# Altium PCB NES Emulator PCB.PcbDoc (part 3 of 3)
Units mm, origin at the board's own origin, x right, y up, seen from the top; angles counter-clockwise.
Board outline 76 x 100 mm, 4 copper layers (Top Layer, GND Plane, Power Layer, Bottom Layer), stack 0.603 mm thick; 101 components, 158 nets, 536 pads, 230 vias.
Unrouted connection lines stored in the file: 6.
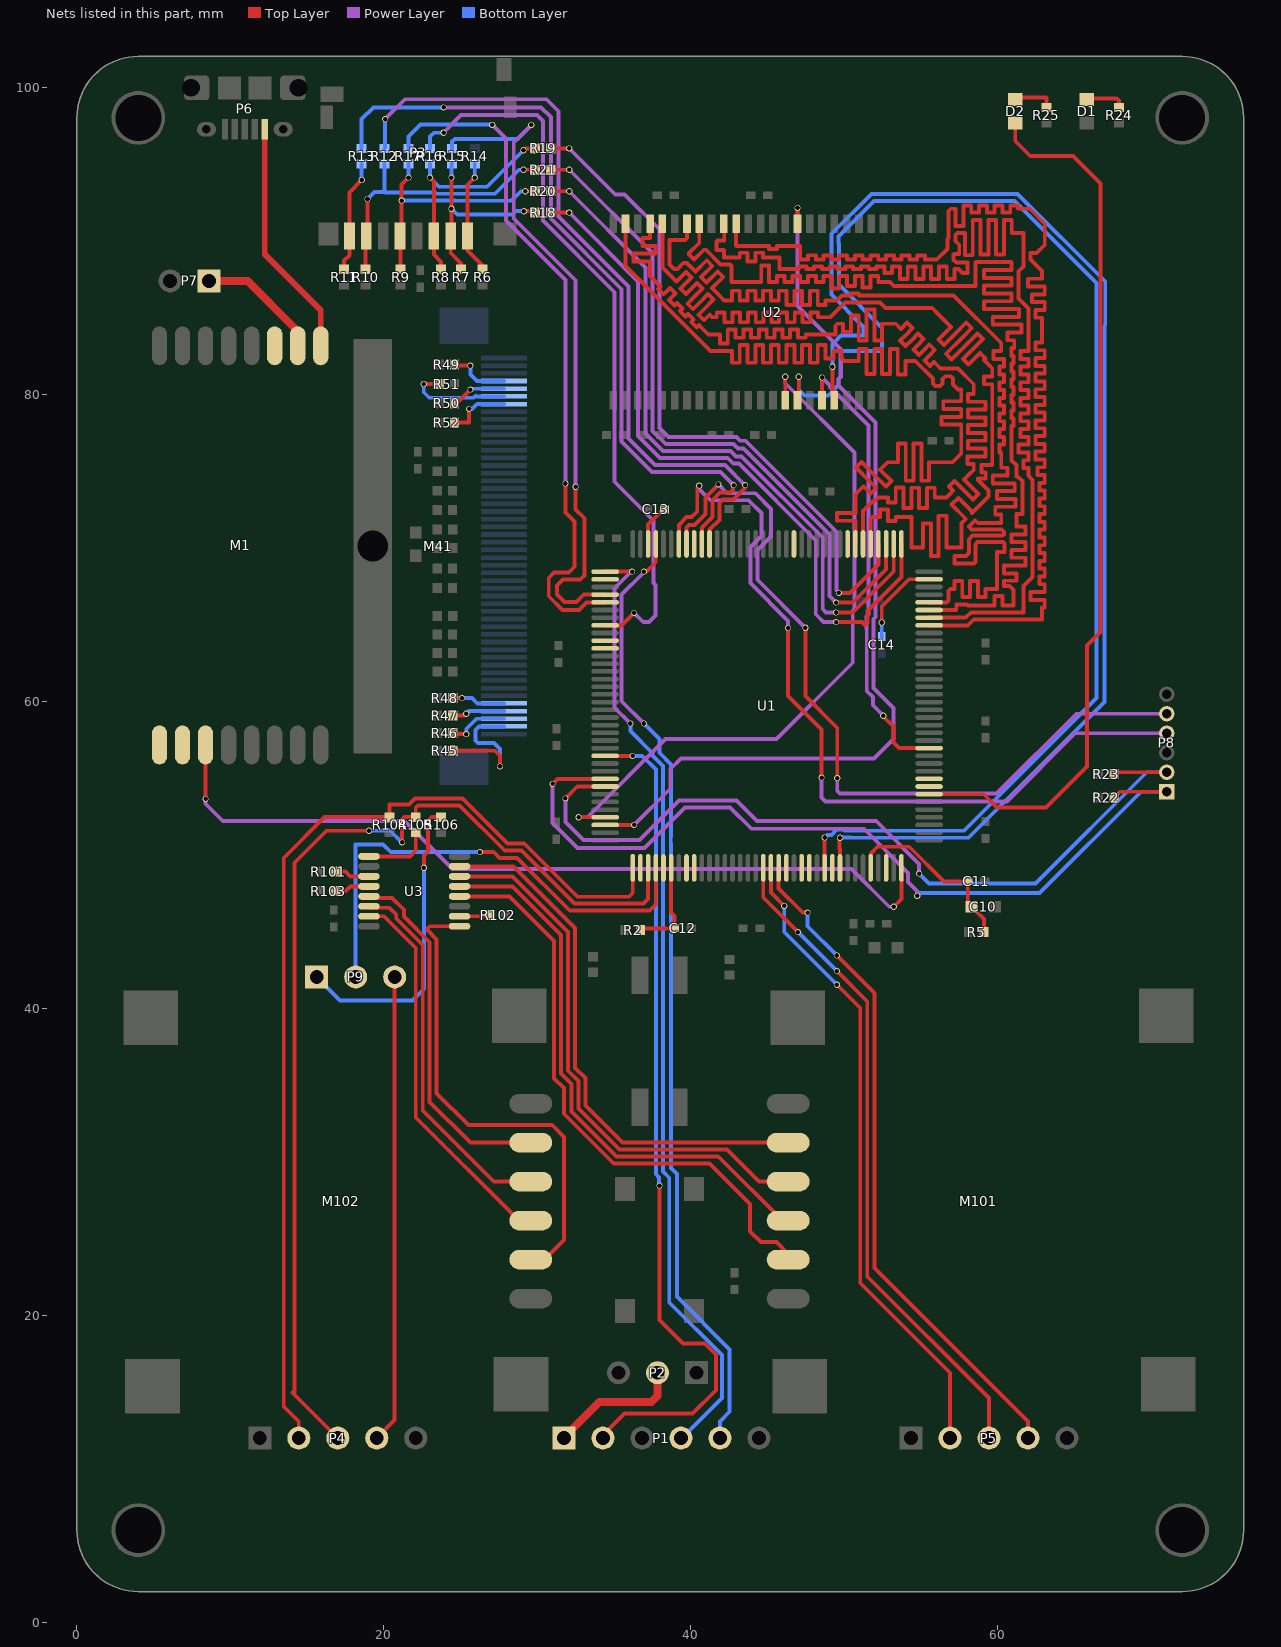
[diagram p5: the nets of this part, all layers, seen from the top]

## Via types
v1: diameter 0.4, hole 0.3, Top Layer to Bottom Layer, 225 vias
v2: diameter 0.65, hole 0.5, Top Layer to Bottom Layer, 2 vias
v3: diameter 0.6, hole 0.4, Top Layer to Bottom Layer, 2 vias
v4: diameter 0.45, hole 0.3, Top Layer to Bottom Layer, 1 vias

## Nets (pads, with @x,y where several pads share a name; then routed paths per layer and width w, separated by ;. In a path a pad name is that pad's centre, name@x,y a point inside that pad or via, vN(x,y) a via of type N, cw(c..) or ccw(c..) an arc to the next point about the centre after c; other vN are vias at no path point) (continued)
MEM_D9: U1.65 U2.44 | length 92.1
  Top Layer w0.254: U2.44@42.941,91.094 42.941,89.675 42.954,89.662 43.817,89.662 45.087,89.662 45.087,89.459 45.595,89.459 45.595,89.662 45.849,89.662 47.119,89.662 47.119,88.773 47.627,88.773 47.627,89.046 48.135,89.046 48.135,88.773 48.643,88.773 48.643,89.039 49.151,89.039 49.151,88.773 49.659,88.773 49.659,89.039 50.167,89.039 50.167,88.773 50.675,88.773 50.675,89.039 51.183,89.039 51.183,88.773 51.691,88.773 51.691,89.039 52.199,89.039 52.199,88.773 52.707,88.773 52.707,89.039 53.215,89.039 53.215,88.773 53.723,88.773 53.723,89.039 54.231,89.039 54.231,88.773 54.739,88.773 54.739,89.039 55.247,89.039 55.247,88.773 55.755,88.773 56.009,88.773 56.703,89.467 56.703,90.101 56.772,90.171 56.772,91.924 56.923,92.075 57.241,92.075 57.241,90.944 57.749,90.944 57.749,92.075 57.749,92.284 58.257,92.284 58.257,92.075 58.257,91.819 58.765,91.819 58.765,92.075 58.765,92.284 59.273,92.284 59.273,92.075 59.273,91.819 59.781,91.819 59.781,92.075 59.781,92.284 60.289,92.284 60.289,92.075 60.289,91.821 60.797,91.821 60.797,92.075 60.797,92.284 61.305,92.284 61.305,92.075 61.813,92.075 62.067,92.075 63.048,91.094 63.048,89.716 62.519,89.187 62.124,89.187 62.124,88.766 62.867,88.023 62.867,87.884 62.867,87.514 61.946,87.514 61.946,87.006 62.867,87.006 63.048,87.006 63.048,86.498 62.867,86.498 62.216,86.498 62.216,85.99 62.867,85.99 63.048,85.99 63.048,85.482 62.867,85.482 62.431,85.482 62.431,84.974 62.867,84.974 62.867,84.466 62.867,84.212 62.867,83.82 62.867,83.365 62.432,83.365 62.432,82.857 62.867,82.857 63.048,82.857 63.048,82.349 62.867,82.349 62.432,82.349 62.432,81.841 62.867,81.841 63.048,81.841 63.048,81.333 62.867,81.333 62.432,81.333 62.432,80.825 62.867,80.825 63.048,80.825 63.048,80.317 62.867,80.317 62.432,80.317 62.432,79.809 62.867,79.809 63.048,79.809 63.048,79.301 62.867,79.301 62.432,79.301 62.432,78.793 62.867,78.793 63.048,78.793 63.048,78.285 62.867,78.285 62.432,78.285 62.432,77.777 62.867,77.777 63.048,77.777 63.048,77.269 62.867,77.269 62.432,77.269 62.432,76.761 62.867,76.761 63.048,76.761 63.048,76.253 62.867,76.253 62.432,76.253 62.432,75.745 62.867,75.745 63.048,75.745 63.048,75.237 62.867,75.237 62.58,75.237 62.58,74.729 62.867,74.729 63.048,74.729 63.048,74.221 62.867,74.221 62.704,74.221 62.704,73.713 62.867,73.713 63.048,73.713 63.048,73.205 62.867,73.205 62.704,73.205 62.704,72.697 62.867,72.697 63.048,72.697 63.048,72.189 62.867,72.189 62.704,72.189 62.704,71.681 62.867,71.681 63.048,71.681 63.048,71.173 62.867,71.173 62.704,71.173 62.704,70.665 62.867,70.665 63.048,70.665 63.048,70.157 62.867,70.157 62.704,70.157 62.704,69.649 62.867,69.649 63.048,69.649 63.048,69.141 62.867,69.141 62.704,69.141 62.704,68.633 62.867,68.633 63.048,68.633 63.048,68.125 62.867,68.125 62.704,68.125 62.704,67.617 62.867,67.617 63.048,67.617 63.048,67.109 62.867,67.109 62.124,67.109 62.124,66.601 62.867,66.601 63.048,66.601 63.048,66.093 62.867,66.093 62.867,65.585 62.867,65.331 58.422,65.331 58.031,64.94 U1.65@55.51,64.94
MEM_D10: U1.66 U2.45 | length 92.2
  Top Layer w0.254: U2.45@42.141,91.094 42.166,91.069 42.166,90.009 41.726,90.009 41.658,89.941 41.658,89.391 41.666,89.382 42.132,89.382 42.141,89.374 42.141,88.909 42.166,88.909 42.674,88.909 43.182,88.909 43.182,89.208 43.69,89.208 43.69,88.909 43.69,88.628 44.198,88.628 44.198,88.909 44.198,89.208 44.706,89.208 44.706,88.909 45.214,88.909 45.468,88.909 45.768,88.909 45.759,88.9 45.759,88.155 45.993,88.155 46.501,88.155 47.009,88.155 47.009,88.319 47.517,88.319 47.517,88.155 48.025,88.155 48.025,88.319 48.533,88.319 48.533,88.155 49.041,88.155 49.041,88.319 49.549,88.319 49.549,88.155 50.057,88.155 50.057,88.319 50.565,88.319 50.565,88.155 51.073,88.155 51.073,88.319 51.581,88.319 51.581,88.155 52.089,88.155 52.089,88.319 52.597,88.319 52.597,88.155 52.597,87.902 53.105,87.902 53.105,88.155 53.105,88.319 53.613,88.319 53.613,88.155 53.613,87.5 54.121,87.5 54.121,88.155 54.121,88.319 54.629,88.319 54.629,88.155 54.629,87.5 55.137,87.5 55.137,88.155 55.137,88.319 55.645,88.319 55.645,88.155 55.645,87.5 56.153,87.5 56.153,88.155 56.153,88.319 56.661,88.319 56.661,88.155 56.661,87.5 57.169,87.5 57.169,88.155 57.423,88.155 57.676,87.902 58.025,87.902 58.025,88.566 57.279,88.566 57.107,88.737 57.107,89.085 57.154,89.132 57.478,89.132 57.478,89.73 57.226,89.982 57.226,90.355 57.361,90.49 57.66,90.49 57.848,90.49 57.848,89.044 58.356,89.044 58.356,90.49 58.356,91.334 58.864,91.334 58.864,90.49 58.864,89.101 59.372,89.101 59.372,90.49 59.372,91.334 59.88,91.334 59.88,90.49 59.88,89.101 60.388,89.101 60.388,90.49 60.388,91.336 60.896,91.336 60.896,90.49 61.404,90.49 61.658,90.49 61.658,88.319 61.342,88.003 61.342,86.222 61.977,85.586 61.977,84.963 61.978,83.693 61.978,83.312 61.978,82.804 61.47,82.804 61.47,82.296 61.978,82.296 61.978,81.788 61.47,81.788 61.47,81.28 61.978,81.28 61.978,80.772 61.47,80.772 61.47,80.264 61.978,80.264 61.978,79.756 61.47,79.756 61.47,79.248 61.978,79.248 61.978,78.74 61.47,78.74 61.47,78.232 61.978,78.232 61.978,77.724 61.47,77.724 61.47,77.216 61.978,77.216 61.978,76.708 61.342,76.708 61.342,76.2 61.978,76.2 61.978,75.692 61.658,75.692 61.658,75.184 61.978,75.184 61.978,74.93 61.978,74.689 62.159,74.508 62.25,74.417 62.25,68.077 61.67,67.497 61.67,65.786 61.669,65.785 58.234,65.785 57.889,65.44 U1.66@55.51,65.44
MEM_D11: U1.67 U2.47 | length 92.1
  Top Layer w0.254: U2.47@40.541,91.094 40.541,89.848 39.88,89.187 39.88,89.099 40.206,88.773 40.841,89.408 40.981,89.408 41.935,88.454 42.534,88.454 42.638,88.349 42.638,87.294 44.071,87.294 44.579,87.294 44.579,88.381 45.087,88.381 45.087,87.294 45.595,87.294 45.595,87.685 46.103,87.685 46.103,87.294 46.611,87.294 46.611,87.685 47.119,87.685 47.119,87.294 47.627,87.294 47.627,87.685 48.135,87.685 48.135,87.294 48.643,87.294 48.643,87.685 49.151,87.685 49.151,87.294 49.151,86.868 49.659,86.868 49.659,87.294 49.659,87.685 50.167,87.685 50.167,87.294 50.167,87.031 50.675,87.031 50.675,87.294 50.675,87.685 51.183,87.685 51.183,87.294 51.183,86.953 51.691,86.953 51.691,87.294 51.691,87.685 52.199,87.685 52.199,87.294 52.707,87.294 52.961,87.294 53.208,87.046 53.342,87.046 53.596,87.046 58.523,87.046 58.523,88.584 58.544,88.584 58.576,88.616 58.676,88.616 60.576,88.616 60.844,88.616 60.888,88.572 60.888,88.138 60.888,88.083 59.085,88.083 59.085,87.575 60.888,87.575 60.888,87.067 59.085,87.067 59.085,86.559 60.888,86.559 60.888,86.051 59.085,86.051 59.085,85.543 60.888,85.543 61.378,85.543 61.378,85.035 60.888,85.035 59.659,85.035 59.659,84.527 60.888,84.527 61.524,84.527 61.524,84.019 60.888,84.019 60.631,84.019 60.631,83.511 60.888,83.511 61.062,83.511 61.062,83.003 60.888,83.003 60.888,82.495 61.016,82.495 61.016,81.987 60.888,81.987 60.888,81.479 61.016,81.479 61.016,80.971 60.888,80.971 60.888,80.463 61.016,80.463 61.016,79.955 60.888,79.955 60.888,79.447 61.016,79.447 61.016,78.939 60.888,78.939 60.888,78.431 61.016,78.431 61.016,77.923 60.888,77.923 60.888,77.415 60.888,76.907 60.888,76.399 60.888,76.145 60.888,75.688 61.204,75.372 61.204,74.641 61.283,74.641 61.593,74.33 61.593,72.189 61.204,72.189 61.204,71.882 61.204,71.374 61.796,71.374 61.796,70.866 61.204,70.866 60.878,70.866 60.878,70.358 61.204,70.358 61.796,70.358 61.796,69.85 61.204,69.85 60.888,69.85 60.888,69.342 61.204,69.342 61.796,69.342 61.796,68.834 61.204,68.834 60.4,68.834 60.4,68.326 61.204,68.326 61.204,68.072 61.204,67.843 60.4,67.843 60.4,67.625 60.4,67.497 60.767,67.497 61.017,67.247 61.017,66.239 60.801,66.239 60.293,66.239 60.293,66.856 59.785,66.856 59.785,66.239 59.531,66.239 58.046,66.239 57.991,66.294 57.279,66.294 57.279,65.94 U1.67@55.51,65.94
MEM_D12: U1.68 U2.48 | length 92.1
  Top Layer w0.254: U2.48@39.741,91.094 39.741,90.158 39.626,90.043 38.611,90.043 38.61,90.042 38.61,88.441 38.902,88.149 39.119,88.149 39.501,88.531 39.741,88.531 39.88,88.392 39.932,88.34 40.291,87.981 41.029,88.718 41.388,88.359 40.65,87.621 41.009,87.262 41.747,88 42.106,87.64 41.369,86.903 41.728,86.544 41.908,86.364 42.166,86.106 42.674,86.106 42.674,86.734 43.182,86.734 43.182,86.106 43.69,86.106 43.69,86.734 44.198,86.734 44.198,86.106 44.706,86.106 44.706,86.734 45.214,86.734 45.214,86.106 45.722,86.106 45.722,86.734 46.23,86.734 46.23,86.106 46.23,85.798 46.738,85.798 46.738,86.106 46.738,86.734 47.246,86.734 47.246,86.106 47.246,85.798 47.754,85.798 47.754,86.106 47.754,86.734 48.262,86.734 48.262,86.106 48.262,85.798 48.77,85.798 48.77,86.106 49.024,86.106 49.508,86.106 49.835,86.433 50.167,86.433 50.421,86.433 50.421,86.56 50.929,86.56 50.929,86.433 53.469,86.433 57.111,86.433 60.215,83.33 60.215,82.804 59.709,82.804 59.709,82.296 60.215,82.296 60.385,82.296 60.385,81.788 60.215,81.788 60.088,81.788 60.088,81.28 60.215,81.28 60.385,81.28 60.385,80.772 60.215,80.772 60.088,80.772 60.088,80.264 60.215,80.264 60.385,80.264 60.385,79.756 60.215,79.756 60.088,79.756 60.088,79.248 60.215,79.248 60.385,79.248 60.385,78.74 60.215,78.74 60.088,78.74 60.088,78.232 60.215,78.232 60.385,78.232 60.385,77.724 60.215,77.724 60.088,77.724 60.088,77.216 60.215,77.216 60.385,77.216 60.385,76.708 60.215,76.708 60.088,76.708 60.088,76.2 60.215,76.2 60.215,75.946 60.215,75.203 60.629,75.203 60.629,74.695 60.215,74.695 59.659,74.695 59.659,74.187 60.215,74.187 61.095,74.187 61.095,73.679 60.215,73.679 59.927,73.679 59.927,73.171 60.215,73.171 61.139,73.171 61.139,72.663 60.215,72.663 59.82,72.663 59.82,72.155 60.215,72.155 60.215,71.901 60.215,71.593 58.682,71.593 58.502,71.773 58.103,71.374 58.286,71.191 58.286,71.173 60.242,71.173 60.383,71.032 60.383,70.866 60.302,70.785 58.342,70.785 58.103,70.545 58.103,69.679 58.071,69.647 58.071,69.626 57.914,69.469 57.165,69.469 57.165,68.98 57.184,68.961 58.427,68.961 58.523,69.057 58.523,70.205 58.676,70.358 60.338,70.358 60.434,70.261 60.434,69.723 59.946,69.723 59.946,69.022 59.946,67.437 59.946,67.31 59.705,67.31 59.197,67.31 59.197,66.792 58.689,66.792 58.689,67.31 58.689,67.828 58.181,67.828 58.181,67.31 58.181,66.792 57.673,66.792 57.673,67.31 57.673,67.828 57.165,67.828 57.165,67.31 56.911,67.31 56.784,67.183 56.784,66.561 56.663,66.44 U1.68@55.51,66.44
MEM_D13: U1.77 U2.50 | length 92.2
  Top Layer w0.254: U2.50@38.141,91.094 38.141,88.519 38.141,88.268 38.35,88.058 38.71,87.699 39.069,87.34 39.679,87.95 40.038,87.591 39.428,86.981 39.328,86.881 39.687,86.522 39.787,86.621 40.398,87.232 40.757,86.873 40.146,86.262 39.772,85.888 40.131,85.529 40.506,85.903 41.116,86.514 41.475,86.154 40.865,85.544 40.49,85.169 40.85,84.81 41.224,85.185 41.404,85.005 41.683,85.005 41.683,85.329 42.191,85.329 42.191,85.005 42.191,84.681 42.699,84.681 42.699,85.005 42.699,85.329 43.207,85.329 43.207,85.005 43.207,84.681 43.715,84.681 43.715,85.005 43.715,85.329 44.223,85.329 44.223,85.005 44.223,84.681 44.731,84.681 44.731,85.005 44.731,85.329 45.239,85.329 45.239,85.005 45.239,84.681 45.747,84.681 45.747,85.005 45.747,85.329 46.255,85.329 46.255,85.005 46.255,84.681 46.763,84.681 46.763,85.005 46.763,85.329 47.271,85.329 47.271,85.005 47.271,84.681 47.779,84.681 47.779,85.005 47.779,85.329 48.287,85.329 48.287,85.005 48.795,85.005 49.049,85.005 50.023,85.979 52.133,85.979 52.304,85.979 52.685,85.598 55.716,85.598 56.097,85.217 56.934,84.38 56.122,83.568 56.481,83.209 57.293,84.021 57.934,84.661 58.293,84.302 57.652,83.662 56.619,82.628 56.978,82.269 58.012,83.302 58.652,83.943 59.011,83.584 58.371,82.943 57.722,82.294 58.081,81.935 58.73,82.584 58.82,82.674 59.179,82.315 59.089,82.225 59.449,81.865 59.628,81.686 59.628,81.661 59.628,81.153 59.093,81.153 59.093,80.645 59.628,80.645 59.628,80.137 59.628,79.629 59.628,79.121 59.628,78.613 59.628,78.105 59.628,77.597 59.628,77.089 59.628,76.581 59.628,76.327 59.628,75.373 58.931,75.373 58.931,74.908 59.179,74.908 59.205,74.883 59.205,74.524 59.189,74.508 58.689,74.508 58.689,74.414 59.372,73.731 59.372,73.34 58.295,72.263 58.295,72.364 57.416,73.242 56.979,72.805 57.899,71.885 57.899,71.867 57.625,71.593 57.625,70.012 56.644,70.012 56.644,72.076 56.136,72.076 56.136,70.012 56.136,69.462 55.628,69.462 55.628,70.012 55.628,71.58 55.12,71.58 55.12,70.012 54.612,70.012 54.358,70.012 54.358,72.009 53.977,72.009 53.342,72.009 53.342,71.724 52.834,71.724 52.834,72.009 52.834,72.49 52.326,72.49 52.326,72.009 52.072,72.009 51.818,72.009 51.71,71.901 U1.77@51.71,70.24
MEM_D14: U1.78 U2.51 | length 92.1
  Top Layer w0.254: U2.51@37.341,91.094 37.341,90.424 37.341,90.17 36.834,90.17 36.834,89.662 37.341,89.662 37.687,89.662 37.687,89.154 37.341,89.154 36.255,89.154 36.255,88.646 37.341,88.646 37.341,88.392 37.341,87.677 37.649,87.369 38.008,87.01 37.861,86.863 38.22,86.503 38.367,86.651 38.642,86.925 39.001,86.566 38.727,86.291 38.579,86.144 38.939,85.785 39.086,85.932 39.445,85.573 39.298,85.426 39.657,85.067 39.804,85.214 40.163,84.854 40.016,84.707 40.375,84.348 40.523,84.495 40.702,84.316 41.127,83.891 41.381,83.891 41.889,83.891 41.889,83.29 42.397,83.29 42.397,83.891 42.397,84.205 42.905,84.205 42.905,83.891 42.905,83.671 43.413,83.671 43.413,83.891 43.413,84.205 43.921,84.205 43.921,83.891 43.921,83.671 44.429,83.671 44.429,83.891 44.429,84.205 44.937,84.205 44.937,83.891 44.937,83.671 45.445,83.671 45.445,83.891 45.445,84.205 45.953,84.205 45.953,83.891 45.953,83.671 46.461,83.671 46.461,83.891 46.461,84.205 46.969,84.205 46.969,83.891 46.969,83.671 47.477,83.671 47.477,83.891 49.405,83.891 49.405,84.455 49.532,84.582 49.913,84.582 49.913,84.057 50.421,84.057 50.421,84.582 50.421,85.128 50.929,85.128 50.929,84.582 50.929,83.496 51.437,83.496 51.437,84.582 51.437,85.525 51.945,85.525 51.945,84.582 51.945,83.496 52.453,83.496 52.453,84.582 52.707,84.582 53.088,84.582 53.342,84.582 53.674,84.25 54.082,84.659 54.442,84.299 54.033,83.891 53.624,83.482 53.983,83.123 54.392,83.531 54.801,83.94 55.16,83.581 54.751,83.172 54.493,82.913 54.852,82.554 55.111,82.813 55.519,83.222 55.879,82.863 55.47,82.454 55.219,82.203 55.579,81.844 55.829,82.095 56.009,81.915 56.263,81.661 57.406,81.661 58.422,80.645 58.422,80.518 58.422,80.01 58.059,80.01 58.059,79.502 58.422,79.502 59.174,79.502 59.174,78.994 58.422,78.994 58.059,78.994 58.059,78.486 58.422,78.486 59.174,78.486 59.174,77.978 58.422,77.978 58.059,77.978 58.059,77.47 58.422,77.47 59.174,77.47 59.174,76.962 58.422,76.962 58.059,76.962 58.059,76.454 58.422,76.454 59.174,76.454 59.174,75.946 58.422,75.946 58.013,75.946 58.013,75.438 58.422,75.438 58.422,75.184 58.422,75.057 58.155,74.79 57.796,74.431 58.743,73.484 58.384,73.124 57.436,74.072 57.155,74.353 56.796,73.994 57.077,73.713 56.898,73.533 56.644,73.279 56.39,73.279 55.882,73.279 55.882,73.903 55.374,73.903 55.374,73.279 55.374,72.579 54.866,72.579 54.866,73.279 54.866,73.903 54.358,73.903 54.358,73.279 54.358,72.579 53.85,72.579 53.85,73.279 53.85,73.921 53.342,73.921 53.342,73.279 53.342,72.944 52.834,72.944 52.834,73.279 52.398,73.279 52.216,73.279 51.934,72.998 51.817,72.998 51.21,72.39 U1.78@51.21,70.24
MEM_D15: U1.79 U2.53 | length 92
  Top Layer w0.254: U2.53@35.741,91.094 35.741,88.341 41.269,82.813 42.039,82.813 42.166,82.813 42.674,82.813 42.674,82.043 43.182,82.043 43.182,82.813 43.182,83.194 43.69,83.194 43.69,82.813 43.69,82.043 44.198,82.043 44.198,82.813 44.198,83.194 44.706,83.194 44.706,82.813 44.706,82.043 45.214,82.043 45.214,82.813 45.214,83.194 45.722,83.194 45.722,82.813 45.722,82.043 46.23,82.043 46.23,82.813 46.23,83.194 46.738,83.194 46.738,82.813 46.738,82.043 47.246,82.043 47.246,82.813 47.246,83.194 47.754,83.194 47.754,82.813 47.754,82.043 48.262,82.043 48.262,82.813 48.262,83.194 48.77,83.194 48.77,82.813 48.77,82.316 49.278,82.316 49.278,82.813 49.532,82.813 49.789,82.813 49.798,82.804 49.798,82.37 49.999,82.169 50.167,82.169 50.421,82.169 50.929,82.169 50.929,82.931 51.437,82.931 51.437,82.169 51.437,81.299 51.945,81.299 51.945,82.169 51.945,82.931 52.453,82.931 52.453,82.169 52.453,81.299 52.961,81.299 52.961,82.169 52.961,82.931 53.469,82.931 53.469,82.169 53.469,81.283 53.977,81.283 53.977,82.169 54.231,82.169 54.485,82.169 ; U1.79@50.71,70.24 50.71,71.501 50.71,71.755 49.502,71.755 49.502,72.263 50.71,72.263 50.71,72.771 50.71,73.459 50.889,73.639 51.248,73.998 51.712,73.534 52.071,73.894 51.608,74.357 50.753,75.211 51.113,75.571 51.967,74.716 52.696,73.987 53.056,74.346 52.326,75.076 52.685,75.435 52.815,75.565 52.961,75.565 53.215,75.565 53.486,75.565 53.486,76.773 53.994,76.773 53.994,75.565 53.994,74.357 54.502,74.357 54.502,75.565 54.502,76.773 55.01,76.773 55.01,75.565 55.01,74.357 55.518,74.357 55.518,75.565 55.772,75.565 57.025,75.565 57.605,76.145 57.605,77.851 57.605,78.015 56.314,78.015 56.314,78.523 57.605,78.523 57.605,79.031 56.437,79.031 56.437,79.539 57.605,79.539 57.605,80.047 57.605,80.301 57.404,80.301 57.077,80.627 57.077,81.019 56.928,81.168 56.568,81.168 56.39,80.99 56.39,80.681 56.241,80.532 55.921,80.532 55.772,80.681 55.772,81.008 54.612,82.169
MEM_NBL0: U1.141 U2.15 | length 45.8
  Top Layer w0.254: v1(32.683,52.44) U1.141@34.41,52.44 ; U2.15@46.141,79.594 v1(46.141,81.133)
  Power Layer w0.254: v1(32.683,52.44) 33.263,52.44 38.354,57.531 45.569,57.531 50.541,62.503 50.541,64.337 50.538,64.34 50.538,65.905 50.664,66.03 50.664,76.185 46.141,80.708 v1(46.141,81.133)
MEM_NBL1: U1.142 U2.39 | length 60.4
  Top Layer w0.254: U1.142@34.41,51.94 35.953,51.94 35.956,51.943 v1(36.298,51.943) ; U2.39@46.941,91.094 v1(46.941,92.13)
  Power Layer w0.254: v1(36.298,51.943) 38.652,54.297 38.652,55.567 39.346,56.261 51.919,56.261 53.189,57.531 53.189,59.563 51.903,60.849 51.903,64.901 51.9,64.904 51.9,65.341 52.026,65.466 52.026,78.141 49.614,80.553 49.614,80.99 49.782,81.158 49.782,82.909 46.941,85.75 v1(46.941,92.13)
  Bottom Layer w0.254: v1(46.941,92.13) v1@46.992,92.181
MEM_NE0: U1.28 U2.19 | length 85
  Top Layer w0.254: v1(49.21,81.788) 49.21,79.853 49.405,79.658 U2.19@49.341,79.594 ; U1.28@49.71,49.14 49.71,50.344 49.683,50.371 49.683,51.078 v1(49.71,51.105)
  Bottom Layer w0.254: v1(49.21,81.788) 49.21,83.251 49.77,83.811 51.22,83.811 51.22,84.418 49.16,86.478 49.16,90.449 51.747,93.037 61.275,93.037 66.985,87.327 66.985,84.502 66.931,84.448 66.931,59.944 58.092,51.105 50.439,51.105 50.428,51.116 49.721,51.116 v1(49.71,51.105)
MEM_RAS: U1.49 U2.18 | length 29.8
  Top Layer w0.254: U2.18@48.541,79.594 v1(48.541,81.082) ; v1(52.524,59.055) 52.524,59.002 53.189,58.338 53.189,57.303 53.552,56.94 U1.49@55.51,56.94
  Power Layer w0.254: v1(48.541,81.082) 49.052,80.571 49.052,80.472 51.572,77.952 51.572,65.654 51.446,65.529 51.446,64.716 51.449,64.713 51.449,60.661 51.846,60.264 51.846,59.733 v1(52.524,59.055)
MEM_WE: U1.26 U2.16 | length 89.5
  Top Layer w0.254: U2.16@46.941,79.594 47.021,79.675 v1(47.021,81.133) ; U1.26@48.71,49.14 v1(48.71,51.121)
  Bottom Layer w0.254: v1(47.021,81.133) 47.021,80.303 47.404,79.92 48.942,79.92 49.614,80.591 49.614,80.99 49.737,81.113 49.737,82.628 49.913,82.804 52.453,82.804 52.453,84.318 49.64,87.131 49.64,89.799 49.614,89.825 49.614,90.261 51.935,92.583 61.087,92.583 66.423,87.247 66.423,60.198 57.784,51.559 50.627,51.559 50.616,51.57 49.99,51.57 49.928,51.632 49.491,51.632 49.148,51.289 48.878,51.289 v1(48.71,51.121)
NetC10_2: C10.2 C11.2 R5.2 U1.32 | length 12.1
  Top Layer w0.254: U1.32@51.71,49.14 51.718,49.149 51.718,50.073 52.162,50.517 54.218,50.517 56.475,48.26 C11.2@58.033,48.26 58.033,46.857 C10.2@58.281,46.609 58.306,46.609 58.554,46.361 58.554,46.336 59.083,45.807 R5.2@59.083,44.958
NetC12_1: C12.1 R2.1 U1.6 | length 6.3
  Top Layer w0.254: R2.1@36.71,45.085 36.829,45.204 C12.1@38.923,45.204 38.923,46.015 38.71,46.228 U1.6@38.71,49.14
NetC13_1: C13.1 U1.106 | length 2.7
  Top Layer w0.254: U1.106@37.21,70.24 37.21,71.509 38.068,72.367 38.148,72.367 C13.1@38.271,72.49
NetC14_1: C14.1 U1.71 | length 5.8
  Top Layer w0.254: v1(52.427,65.122) 52.427,66.167 54.2,67.94 U1.71@55.51,67.94
  Bottom Layer w0.254: v1(52.427,65.122) 52.427,64.227 C14.1@52.435,64.219
NetD1_1: D1.1 R24.2 | length 2.6
  Top Layer w0.254: D1.1@65.786,99.2 65.852,99.266 67.738,99.266 67.887,99.117 R24.2@67.887,98.671
NetD2_1: D2.1 R25.2 | length 2.7
  Top Layer w0.254: D2.1@61.124,99.2 61.238,99.314 63.14,99.314 63.156,99.298 R25.2@63.156,98.671
NetM1_1: M1.1 P6.1 | length 15.6
  Top Layer w0.381: P6.1@12.238,97.249 12.238,89.108 15.882,85.464 M1.1@15.882,83.15 M1.1@15.859,83.127
NetM1_2: M1.2 P7.1 | length 8.1
  Top Layer w0.508: P7.1@8.612,87.376 11.114,87.376 14.288,84.202 14.288,83.244 M1.2@14.382,83.15
NetM41_2: M41.2 R45.1 | length 9.5
  Top Layer w0.254: R45.1@24.479,56.769 27.247,56.769 27.559,56.457 v1(27.559,55.753)
  Bottom Layer w0.254: v1(27.559,55.753) 27.559,56.896 27.173,57.282 26.115,57.282 25.966,57.431 25.966,58.115 26.205,58.354 M41.2@27.818,58.354
NetM41_3: M41.3 R46.1 | length 4
  Top Layer w0.254: R46.1@24.479,57.912 24.537,57.854 v1(25.36,57.854)
  Bottom Layer w0.254: v1(25.36,57.854) 25.36,58.173 26.041,58.854 M41.3@27.818,58.854
NetM41_4: M41.4 R47.1 | length 3.5
  Top Layer w0.254: R47.1@24.479,59.055 25.233,59.055 v1(25.36,59.182)
  Bottom Layer w0.254: v1(25.36,59.182) 25.532,59.354 M41.4@27.818,59.354
NetM41_5: M41.5 R48.1 | length 3.5
  Top Layer w0.254: R48.1@24.479,60.198 v1(25.089,60.198)
  Bottom Layer w0.254: v1(25.089,60.198) 25.734,60.198 26.078,59.854 M41.5@27.818,59.854
NetM41_44: M41.44 R52.1 | length 4.2
  Top Layer w0.254: R52.1@24.606,78.15 25.548,78.15 v1(25.548,79.039)
  Bottom Layer w0.254: v1(25.548,79.039) 25.748,79.039 25.994,79.285 26.012,79.285 26.081,79.354 M41.44@27.818,79.354
NetM41_45: M41.45 R51.1 | length 7
  Top Layer w0.254: v1(22.597,80.66) R51.1@23.606,80.66
  Bottom Layer w0.254: v1(22.597,80.66) 22.597,80.122 22.955,79.764 25.848,79.764 25.966,79.881 25.996,79.881 26.023,79.854 M41.45@27.818,79.854
NetM41_46: M41.46 R50.1 | length 3.6
  Top Layer w0.254: R50.1@24.606,79.39 24.73,79.39 v1(25.63,80.291)
  Bottom Layer w0.254: v1(25.63,80.291) 25.693,80.354 M41.46@27.818,80.354
NetM41_47: M41.47 R49.1 | length 4
  Top Layer w0.254: R49.1@24.606,81.921 24.673,81.854 v1(25.63,81.854)
  Bottom Layer w0.254: v1(25.63,81.854) 25.63,81.28 26.056,80.854 M41.47@27.818,80.854
NetM101_2: M101.2 U3.7 | length 35.3
  Top Layer w0.254: U3.7@24.926,49.239 28.452,49.239 32.453,45.238 32.453,36.117 33.126,35.444 33.126,33.652 35.536,31.242 M101.2@46.331,31.242
NetM101_3: M101.3 U3.6 | length 36
  Top Layer w0.254: U3.6@24.926,48.589 28.367,48.589 31.999,44.957 31.999,35.929 32.672,35.256 32.672,33.464 35.348,30.788 42.34,30.788 44.426,28.702 M101.3@46.331,28.702
NetM101_4: M101.4 U3.5 | length 36.8
  Top Layer w0.254: U3.5@24.926,47.939 28.375,47.939 31.545,44.769 31.545,35.741 32.218,35.068 32.218,33.276 35.16,30.334 41.778,30.334 45.95,26.162 M101.4@46.331,26.162
NetM101_5: M101.5 U3.4 | length 38.7
  Top Layer w0.254: U3.4@24.926,47.289 28.184,47.289 31.091,44.382 31.091,35.433 31.726,34.798 31.726,33.126 34.972,29.88 41.216,29.88 43.855,27.241 43.855,25.463 44.553,24.765 45.569,24.765 46.331,24.003 M101.5@46.331,23.622
NetM102_2: M102.2 U3.13 | length 23.5
  Top Layer w0.254: U3.13@19.026,47.289 19.124,47.191 20.535,47.191 21.312,46.414 21.312,45.968 22.982,44.298 22.982,33.89 25.63,31.242 M102.2@29.567,31.242
NetM102_3: M102.3 U3.14 | length 24.4
  Top Layer w0.254: U3.14@19.026,46.639 19.124,46.541 20.364,46.541 20.804,46.101 20.804,45.834 22.528,44.11 22.528,33.328 27.154,28.702 M102.3@29.567,28.702
NetM102_4: M102.4 U3.15 | length 25.2
  Top Layer w0.254: U3.15@19.026,45.989 20.007,45.989 22.074,43.922 22.074,32.893 28.805,26.162 M102.4@29.567,26.162
NetM102_5: M102.5 U3.1 | length 32
  Top Layer w0.254: U3.1@24.926,45.339 22.985,45.339 22.836,45.19 22.836,45.086 23.436,44.486 23.436,34.452 25.503,32.385 30.964,32.385 31.726,31.623 31.726,24.892 30.456,23.622 M102.5@29.567,23.622
NetP1_1: P1.1 P2.2 | length 8.7
  Top Layer w0.508: P1.1@31.726,12.052 34.025,14.351 37.425,14.351 37.822,14.748 P2.2@37.822,16.256
NetP4_4: P4.4 P9.3 | length 30.5
  Top Layer w0.254: P4.4@19.534,12 20.701,13.167 P9.3@20.701,42.037
NetP9_1: P9.1 R106.1 | length 19.9
  Top Layer w0.254: v1(22.606,49.149) 22.606,49.946 22.86,50.2 22.86,52.187 23.116,52.443 R106.1@23.725,52.443
  Bottom Layer w0.254: P9.1@15.621,42.037 17.145,40.513 21.854,40.513 22.606,41.265 v1(22.606,49.149)
NetR101_1: R101.1 U3.11 | length 2.3
  Top Layer w0.254: R101.1@16.859,48.895 17.502,48.895 17.808,48.589 U3.11@19.026,48.589
NetR102_2: R102.2 U3.2 | length 2
  Top Layer w0.254: U3.2@24.926,45.989 26.847,45.989 R102.2@26.916,46.058
NetR103_2: R103.2 U3.12 | length 2.3
  Top Layer w0.254: R103.2@16.859,47.625 17.502,47.625 17.816,47.939 U3.12@19.026,47.939
PA0: U1.34
PA2: M1.3 U1.36 | length 54.2
  Top Layer w0.254: v1(8.382,53.634) M1.3@8.382,57.15 ; v1(53.208,46.609) 53.21,46.609 53.71,47.109 53.71,47.4 53.714,47.404 53.714,47.841 53.71,47.845 U1.36@53.71,49.14 U1.36@53.714,49.136
  Power Layer w0.254: v1(8.382,53.634) 8.382,53.316 9.501,52.197 21.336,52.197 24.457,49.076 50.448,49.076 52.915,46.609 v1(53.208,46.609)
PA7: D2.2 U1.43 | length 57.9
  Top Layer w0.254: U1.43@55.51,53.94 59.073,53.94 59.927,53.086 63.119,53.086 65.786,55.753 65.786,63.619 66.675,64.508 66.675,93.726 64.897,95.504 62.103,95.504 61.124,96.483 D2.2@61.124,97.65
PA8: U1.100
PA9: P8.5 U1.101 | length 53.6
  Top Layer w0.254: U1.101@39.71,70.24 39.71,71.318 39.858,71.467 40.228,71.467 40.944,72.183 40.944,73.279 v1(41.783,74.118) ; v1(47.455,64.779) 47.455,60.326 49.53,58.251 v1(49.53,54.991)
  Power Layer w0.254: v1(41.783,74.118) 42.356,73.545 44.191,73.545 45.212,72.524 45.212,70.739 44.323,69.85 44.323,67.911 v1(47.455,64.779) ; v1(49.53,54.991) 49.53,54.155 49.71,53.975 59.902,53.975 65.109,59.182 P8.5@70.993,59.182
PA10: P8.4 U1.102 | length 54.7
  Top Layer w0.254: U1.102@39.21,70.24 39.21,71.487 39.718,71.995 40.049,71.995 40.408,72.354 40.408,73.911 v1(40.541,74.044) ; v1(46.331,64.77) 46.331,60.345 48.514,58.162 v1(48.514,55.018)
  Power Layer w0.254: v1(40.541,74.044) 40.569,74.016 40.569,73.797 41.275,73.091 43.75,73.091 44.595,72.246 44.595,70.764 43.869,70.038 43.869,67.695 46.331,65.233 v1(46.331,64.77) ; v1(48.514,55.018) 48.514,53.721 48.768,53.467 60.579,53.467 65.024,57.912 P8.4@70.993,57.912
PA15: U1.110
PB3: P1.2 U1.133 | length 55.3
  Top Layer w0.254: P1.2@34.266,12 34.266,12.192 35.663,13.589 40.108,13.589 41.632,15.113 41.632,17.425 40.896,18.161 39.473,18.161 37.949,19.685 v1(37.949,28.448) ; U1.133@34.41,56.44 v1(36.201,56.44)
  Bottom Layer w0.254: v1(36.201,56.44) 36.825,56.44 37.714,55.552 37.714,29.184 37.921,28.977 37.921,28.476 v1(37.949,28.448)
PB6: P8.1 R22.2 U1.136 | length 57.2
  Top Layer w0.254: v1(30.988,54.61) 31.318,54.94 U1.136@34.41,54.94 ; R22.2@67.556,53.721 67.556,53.746 67.729,53.919 67.754,53.919 67.937,54.102 P8.1@70.993,54.102
  Power Layer w0.254: 30.977,54.229 30.988,54.24 v1(30.988,54.61) ; 30.988,54.229 30.988,52.07 32.623,50.435 36.973,50.435 39.624,53.086 42.545,53.086 43.942,51.689 51.272,51.689 54.141,48.82 54.141,48.221 54.734,47.628 54.734,47.321 v1(54.737,47.318)
  Bottom Layer w0.254: v1(54.737,47.318) 54.737,47.328 54.907,47.498 62.705,47.498 69.309,54.102 P8.1@70.993,54.102
PB7: P8.2 R23.2 U1.137 | length 54.5
  Top Layer w0.254: v1(31.822,53.667) 32.595,54.44 U1.137@34.41,54.44 ; R23.2@67.548,55.245 67.675,55.372 P8.2@70.993,55.372 P8.2@70.866,55.245
  Power Layer w0.254: v1(31.822,53.667) 31.822,52.125 33.002,50.945 36.636,50.945 39.231,53.54 42.966,53.54 44.309,52.197 52.07,52.197 54.864,49.403 v1(54.864,48.768)
  Bottom Layer w0.254: v1(54.864,48.768) 55.499,48.133 62.451,48.133 69.69,55.372 P8.2@70.993,55.372
PB12: R18.1 U1.73 | length 46.6
  Top Layer w0.254: R18.1@30.863,91.821 v1(32.071,91.821) ; v1(49.453,65.151) 51.132,65.151 51.335,64.948 51.492,65.105 51.492,65.874 53.71,68.092 U1.73@53.71,70.24
  Power Layer w0.254: v1(32.071,91.821) 36.552,87.34 36.552,77.27 37.984,75.838 42.396,75.838 42.758,75.476 43.121,75.476 48.128,70.469 48.128,65.665 48.642,65.151 v1(49.453,65.151)
PB13: R20.1 U1.74 | length 45.7
  Top Layer w0.254: R20.1@30.863,93.218 v1(32.071,93.218) ; v1(49.453,65.779) 50.541,65.779 53.21,68.448 U1.74@53.21,70.24
  Power Layer w0.254: v1(32.071,93.218) 37.041,88.248 37.041,77.423 38.172,76.292 42.584,76.292 42.93,75.946 43.293,75.946 48.582,70.657 48.582,65.999 48.802,65.779 v1(49.453,65.779)
PB14: R21.1 U1.75 | length 45.2
  Top Layer w0.254: R21.1@30.863,94.615 v1(32.071,94.615) ; v1(49.453,66.421) 50.541,66.421 52.71,68.59 U1.75@52.71,70.24
  Power Layer w0.254: v1(32.071,94.615) 37.495,89.191 37.495,77.611 38.36,76.746 42.772,76.746 43.064,76.454 43.427,76.454 49.036,70.845 49.036,66.838 v1(49.453,66.421)
PB15: R19.1 U1.76 | length 45.3
  Top Layer w0.254: R19.1@30.863,96.012 31.625,96.012 31.633,96.004 v1(32.071,96.004) ; v1(49.633,67.056) 49.649,67.04 50.352,67.04 52.21,68.898 U1.76@52.21,70.24
  Power Layer w0.254: v1(32.071,96.004) 35.067,93.009 35.68,93.009 37.949,90.74 37.949,77.799 38.548,77.2 42.96,77.2 43.198,76.962 43.561,76.962 49.49,71.033 49.49,67.239 49.633,67.096 v1(49.633,67.056)
PC1: U1.27
PC4: U1.44
PC5: U1.45
PC8: R12.1 U1.98 | length 50.7
  Top Layer w0.254: U1.98@41.21,70.868 41.218,70.877 41.218,71.173 41.852,71.807 41.852,72.902 42.086,73.137 42.767,73.137 43.529,73.899 v1(43.529,74.072)
  Power Layer w0.254: v1(20.076,97.917) 21.365,99.206 30.598,99.206 31.379,98.425 31.379,91.581 35.939,87.022 35.939,77.098 37.653,75.384 42.208,75.384 v1@43.525,74.067
  Bottom Layer w0.254: R12.1@20.025,96.004 20.076,96.055 v1(20.076,97.917)
PC9: R13.1 U1.99 | length 51.4
  Top Layer w0.254: U1.99@40.71,70.24 40.718,70.249 40.718,71.315 41.398,71.995 41.398,73.09 41.898,73.591 42.579,73.591 42.747,73.759 42.747,74.044 v1(42.775,74.072)
  Power Layer w0.254: v1(23.886,98.679) 30.236,98.679 30.871,98.044 30.871,91.447 35.485,86.834 35.485,76.91 37.465,74.93 41.917,74.93 v1(42.775,74.072)
  Bottom Layer w0.254: R13.1@18.552,96.004 18.552,97.917 19.314,98.679 v1(23.886,98.679)
PC11: R15.1 U1.112 | length 44
  Top Layer w0.254: v1(32.488,73.97) 32.488,72.49 33.063,71.914 33.063,68.199 32.79,67.926 31.66,67.926 31.273,67.539 31.273,66.943 31.751,66.465 32.543,66.465 33.019,66.94 U1.112@34.41,66.94
  Power Layer w0.254: v1(29.601,97.536) 28.458,96.393 28.458,91.447 32.488,87.417 v1(32.488,73.97)
  Bottom Layer w0.254: R15.1@24.445,96.004 24.445,96.444 24.632,96.631 26.379,96.631 26.382,96.628 28.693,96.628 v1(29.601,97.536)
PC12: R17.1 U1.113 | length 45
  Top Layer w0.254: v1(31.822,74.176) 31.822,72.294 32.417,71.699 32.417,68.757 32.039,68.38 31.256,68.38 31.245,68.369 31.091,68.369 30.738,68.016 30.738,66.836 31.634,65.94 32.701,65.94 33.192,66.431 34.401,66.431 U1.113@34.41,66.44
  Power Layer w0.254: v1(27.061,97.536) 27.95,96.647 27.95,91.313 31.822,87.441 v1(31.822,74.176)
  Bottom Layer w0.254: R17.1@21.6,96.004 21.6,96.774 22.381,97.555 27.042,97.555 v1(27.061,97.536)
PC14: U1.8
PC15: U1.9
PD2: R16.1 U1.116 | length 48.2
  Top Layer w0.254: U1.116@34.41,64.94 35.478,64.94 v1(36.29,65.752)
  Power Layer w0.254: v1(23.886,97.028) 25.029,98.171 29.982,98.171 30.363,97.79 30.363,91.303 35.031,86.635 35.031,74.292 37.568,71.755 37.568,67.691 37.695,67.564 37.695,65.568 37.278,65.151 36.891,65.151 v1(36.29,65.752)
  Bottom Layer w0.254: R16.1@22.997,96.004 22.997,96.774 23.251,97.028 v1(23.886,97.028)
PD4: U1.118
PD5: U1.119
PD11: U1.80
PE2: P4.2 R104.1 U1.1 | length 67.4
  Top Layer w0.254: P4.2@14.454,12 14.454,13.081 13.476,14.059 13.476,16.678 13.476,48.913 13.476,49.784 16.135,52.443 R104.1@20.364,52.443 20.364,53.281 21.627,53.281 22.013,53.667 25.114,53.667 28.057,50.724 29.142,50.724 32.603,47.263 35.975,47.263 36.21,47.498 U1.1@36.21,49.14
PE3: U1.2
PE4: P4.3 R105.1 U1.3 | length 70.1
  Top Layer w0.254: P4.3@16.994,12 14.031,14.963 14.17,14.963 14.17,49.476 16.256,51.562 v1(19.026,51.562) ; v1(21.185,50.8) 21.185,52.294 21.334,52.443 R105.1@22.074,52.443 22.074,53.086 22.201,53.213 24.926,53.213 27.869,50.27 28.954,50.27 32.415,46.809 36.902,46.809 37.21,47.117 U1.3@37.21,49.14
  Bottom Layer w0.254: v1(19.026,51.562) 20.414,51.562 21.176,50.8 v1(21.185,50.8)
PE5: P9.2 U1.4 | length 32.5
  Top Layer w0.254: v1(26.254,50.165) 27.154,50.165 27.535,49.784 28.678,49.784 32.107,46.355 37.314,46.355 37.71,46.751 U1.4@37.71,49.14
  Bottom Layer w0.254: P9.2@18.161,42.037 18.161,50.673 19.939,50.673 20.447,50.165 v1(26.254,50.165)
PE6: U1.5
PF6: P5.3 U1.18 | length 43.2
  Top Layer w0.254: U1.18@44.71,49.14 44.71,47.214 v1(46.966,44.958) ; v1(49.506,42.418) 51.487,40.437 51.487,22.53 59.412,14.605 P5.3@59.412,12
  Bottom Layer w0.254: v1(46.966,44.958) v1(49.506,42.418)
PF7: P5.2 U1.19 | length 42
  Top Layer w0.254: U1.19@45.21,49.14 45.21,47.537 v1(46.077,46.669) ; v1(49.506,41.529) 51.03,40.005 51.03,22.098 56.872,16.256 P5.2@56.872,12
  Bottom Layer w0.254: v1(46.077,46.669) 46.077,44.958 v1(49.506,41.529)
PF8: P5.4 U1.20 | length 44.1
  Top Layer w0.254: U1.20@45.71,49.14 45.71,47.802 47.284,46.228 v1(47.601,46.228) ; v1(49.506,43.434) 51.96,40.98 51.96,23.073 61.952,13.081 P5.4@61.952,12
  Bottom Layer w0.254: v1(47.601,46.228) 47.601,45.339 v1(49.506,43.434)
PF9: U1.21
PG2: U1.87
PH0: U1.23
PH1: U1.24
PS_CTRL: R105.2 U3.9 | length 4.4
  Top Layer w0.254: U3.9@19.026,49.889 21.693,49.889 22.074,50.27 R105.2@22.074,51.443
SD_CLK: P3.5 R9.2 R17.2 R20.2 | length 16.1
  Top Layer w0.254: R9.2@21.092,88.13 21.092,90.269 P3.5@21.051,90.31 21.158,90.417 v1(21.158,92.602) 21.158,93.665 v1(21.6,94.107) ; v1(29.202,93.218) R20.2@29.863,93.218
  Bottom Layer w0.254: v1(21.158,92.602) 24.612,92.602 24.614,92.6 28.312,92.6 28.93,93.218 v1(29.202,93.218) ; v1(21.6,94.107) R17.2@21.6,95.004
SD_CS/DAT3: P3.2 R7.2 R15.2 R18.2 | length 13
  Top Layer w0.254: v1(24.394,94.107) v1(24.394,92.075) 24.394,90.353 P3.2@24.351,90.31 24.351,89.193 25.029,88.515 R7.2@25.029,88.13 ; v1(29.119,91.916) 29.768,91.916 R18.2@29.863,91.821
  Bottom Layer w0.254: v1(24.394,92.075) 24.775,91.694 28.363,91.694 28.585,91.916 v1(29.119,91.916) ; v1(24.394,94.107) 24.394,94.953 R15.2@24.445,95.004
SD_DAT1: P3.8 R11.2 R13.2 | length 7.3
  Top Layer w0.254: R11.2@17.409,88.13 17.409,88.698 17.751,89.04 P3.8@17.751,90.31 17.751,93.146 v1(18.552,93.947)
  Bottom Layer w0.254: v1(18.552,93.947) R13.2@18.552,95.004
SD_DAT2: P3.1 R6.2 R14.2 | length 7.5
  Top Layer w0.254: v1(25.918,94.107) 25.451,93.64 P3.1@25.451,90.31 25.451,89.359 26.426,88.384 R6.2@26.426,88.13
  Bottom Layer w0.254: v1(25.918,94.107) R14.2@25.918,95.004
SD_DI/CMD: P3.3 R8.2 R16.2 R19.2 | length 15.3
  Top Layer w0.254: v1(22.997,94.107) 23.251,93.853 P3.3@23.251,90.31 23.251,89.085 23.716,88.62 R8.2@23.716,88.13 ; v1(29.093,95.885) 29.133,95.885 29.26,96.012 R19.2@29.863,96.012
  Bottom Layer w0.254: R16.2@22.997,95.004 v1(22.997,94.107) 23.594,93.51 24.989,93.51 24.991,93.508 26.716,93.508 v1(29.093,95.885)
SD_DO/DAT0: P3.7 R10.2 R12.2 R21.2 | length 18.3
  Top Layer w0.254: R10.2@18.806,88.13 18.806,90.265 P3.7@18.851,90.31 18.933,90.392 v1(18.933,92.71) ; v1(29.093,94.615) R21.2@29.863,94.615
  Bottom Layer w0.254: v1(18.933,92.71) 19.377,93.154 20.076,93.154 ; R12.2@20.025,95.004 20.025,93.205 20.076,93.154 ; v1(29.093,94.615) 28.803,94.615 27.242,93.054 24.803,93.054 24.801,93.056 23.406,93.056 23.333,93.129 20.101,93.129 20.076,93.154
SWCLK: P1.4 U1.109 | length 62.7
  Top Layer w0.254: U1.109@34.41,68.44 v1(36.164,68.44)
  Power Layer w0.254: v1(36.051,58.547) 35.028,59.57 35.028,67.357 36.038,68.367 36.051,68.367 36.124,68.44 v1(36.164,68.44)
  Bottom Layer w0.254: v1(36.051,58.547) 36.051,58.051 37.495,56.607 37.495,56.454 38.168,55.781 38.168,29.372 38.584,28.956 38.584,20.828 42.013,17.399 42.013,14.605 39.408,12 P1.4@39.346,12
SWDIO: P1.5 U1.105 | length 62.5
  Top Layer w0.254: v1(36.933,68.44) 37.098,68.44 37.71,69.052 U1.105@37.71,70.24
  Power Layer w0.254: v1(36.933,58.547) 35.482,59.998 35.482,66.949 36.86,68.327 36.933,68.4 v1(36.933,68.44)
  Bottom Layer w0.254: v1(36.933,58.547) 37.949,57.531 37.949,56.642 38.711,55.88 38.711,51.192 38.683,51.164 38.683,50.727 38.711,50.699 38.711,29.591 39.092,29.21 39.092,21.209 42.521,17.78 42.521,13.716 41.886,13.081 P1.5@41.886,12
pads on no net: M41.0 M101.0 M102.0 P3.10 P3.11 P3.12 P3.13 P3.14 P6. P6.2 P6.3 P6.4 U2.36 U2.40

## Polygon pours and split planes (outlines as drawn)
GND on GND Plane (split plane): 4,101.49 72,101.49 72.017,101.491 72.249,101.483 72.497,101.456 72.742,101.412 72.984,101.35 73.22,101.272 73.451,101.176 73.673,101.065 73.888,100.937 74.093,100.795 74.287,100.639 74.469,100.469 74.639,100.287 74.795,100.093 74.937,99.888 75.065,99.673 75.176,99.451 75.272,99.22 75.35,98.984 75.412,98.742 75.456,98.497 75.483,98.249 75.491,98.017 75.49,98 75.49,6 75.491,5.983 75.483,5.751 75.456,5.503 75.412,5.258 75.35,5.016 75.272,4.78 75.176,4.549 75.065,4.327 74.937,4.112 74.795,3.907 74.639,3.713 74.469,3.531 74.287,3.361 74.093,3.205 73.888,3.063 73.673,2.935 73.451,2.824 73.22,2.728 72.984,2.65 72.742,2.588 72.497,2.544 72.249,2.517 72.017,2.509 72,2.51 4,2.51 3.983,2.509 3.751,2.517 3.503,2.544 3.258,2.588 3.016,2.65 2.78,2.728 2.549,2.824 2.327,2.935 2.112,3.063 1.907,3.205 1.713,3.361 1.531,3.531 1.361,3.713 1.205,3.907 1.063,4.112 0.935,4.327 0.824,4.549 0.728,4.78 0.65,5.016 0.588,5.258 0.544,5.503 0.517,5.751 0.509,5.983 0.51,6 0.51,98 0.509,98.017 0.517,98.249 0.544,98.497 0.588,98.742 0.65,98.984 0.728,99.22 0.824,99.451 0.935,99.673 1.063,99.888 1.205,100.093 1.361,100.287 1.531,100.469 1.713,100.639 1.907,100.795 2.112,100.937 2.327,101.065 2.549,101.176 2.78,101.272 3.016,101.35 3.258,101.412 3.503,101.456 3.751,101.483 3.983,101.491

## Silkscreen, mask and mechanical layers (free items; w line width, h text height)
Top Overlay:
  text "CHR" at 60.452,100.076 h1
  text "PWR" at 65.151,100.076 h1
  text "BAT" at 6.072,90.678 h1
  text "-" at 5.691,89.027 h1
  text "+" at 8.358,89.027 h1
  text "UCSB IEEE" at 69.088,80.291 h2.4 r90
  text "Game Dude" at 66.294,64.135 h6.2 r90
  text "ON - OFF" at 5.969,41.91 h1
  text "5V" at 31.496,15.621 h1
  text "3V3" at 42.164,15.621 h1
Bottom Overlay:
  drawing of 5 lines, arcs and shapes, not listed
  text "BAT" at 8.763,90.678 h1
  text "-" at 5.691,89.027 h1
  text "+" at 8.358,89.027 h1
  text "GND" at 75.057,59.991 h0.8
  text "TX" at 75.057,58.801 h0.8
  text "RX" at 75.057,57.531 h0.8
  text "GND" at 75.057,56.261 h0.8
  text "SDA" at 75.057,54.991 h0.8
  text "SCL" at 75.057,53.721 h0.8
  text "Gamedude Development Board" at 60.96,36.83 h4
  text "ECE 150 Project by Boning & Jeff" at 47.244,34.544 h1.5
  text "University of California, Santa Barbara" at 48.387,32.512 h1.5
  text "2 . 25 . 2019" at 41.148,30.734 h1.5
  text "3V3" at 11.43,3.302 h1 r270
  text "SCK" at 13.97,3.302 h1 r270
  text "NSS" at 16.51,3.302 h1 r270
  text "MISO" at 19.05,3.302 h1 r270
  text "GND" at 21.59,3.302 h1 r270
  text "RST" at 43.942,3.302 h1 r270
  text "3V3" at 53.848,3.302 h1 r270
  text "SCK" at 56.388,3.302 h1 r270
  text "NSS" at 58.928,3.302 h1 r270
  text "MISO" at 61.468,3.302 h1 r270
  text "GND" at 64.008,3.302 h1 r270
  text "POWER" at 31.242,3.175 h1 r270
  text "SWO" at 33.782,3.175 h1 r270
  text "GND" at 36.322,3.175 h1 r270
  text "SWCLK" at 38.862,3.175 h1 r270
  text "SWDIO" at 41.402,3.175 h1 r270
Mechanical 1:
  lines w0.1: 0,6 ccw(c4,6) 4,2 ; 0,98 cw(c4,98) 4,102 ; 72,2 ccw(c72,6) 76,6 ; 72,102 cw(c72,98) 76,98
  lines w0.203: 0,6 0,98 ; 4,2 72,2 ; 4,102 72,102 ; 76,6 76,98

## Text inside footprints (layer, text, board x,y; h text height)
M102: Top Overlay "U" at 16.359,32.131 h2; Top Overlay "L" at 11.279,27.062 h2; Top Overlay "R" at 21.439,27.051 h2; Top Overlay "D" at 16.359,21.717 h2